# Altium PCB led_light.PcbDoc
Units mil, origin at the board's own origin, x right, y up, seen from the top; angles counter-clockwise.
Board outline 6000 x 4000 mil, 2 copper layers (Top Layer, Bottom Layer); 33 components, 19 nets, 100 pads, 3 vias.
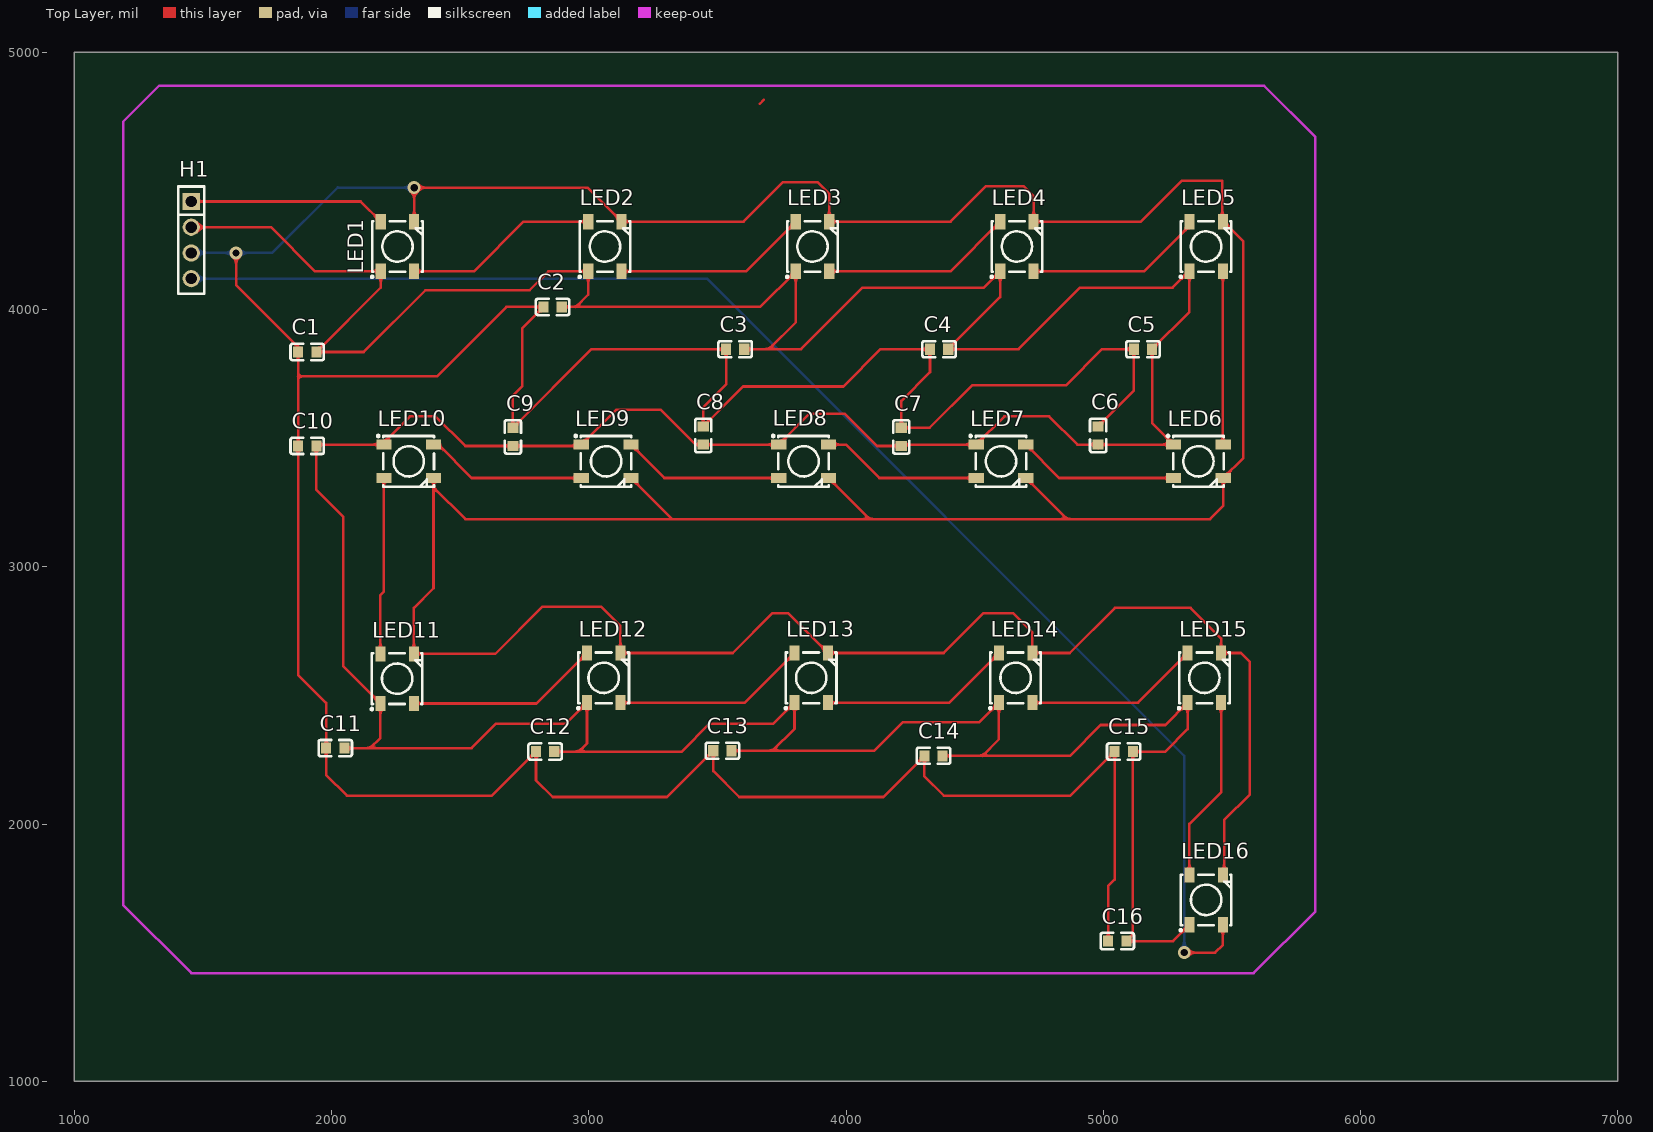
[diagram p0: Top Layer view]
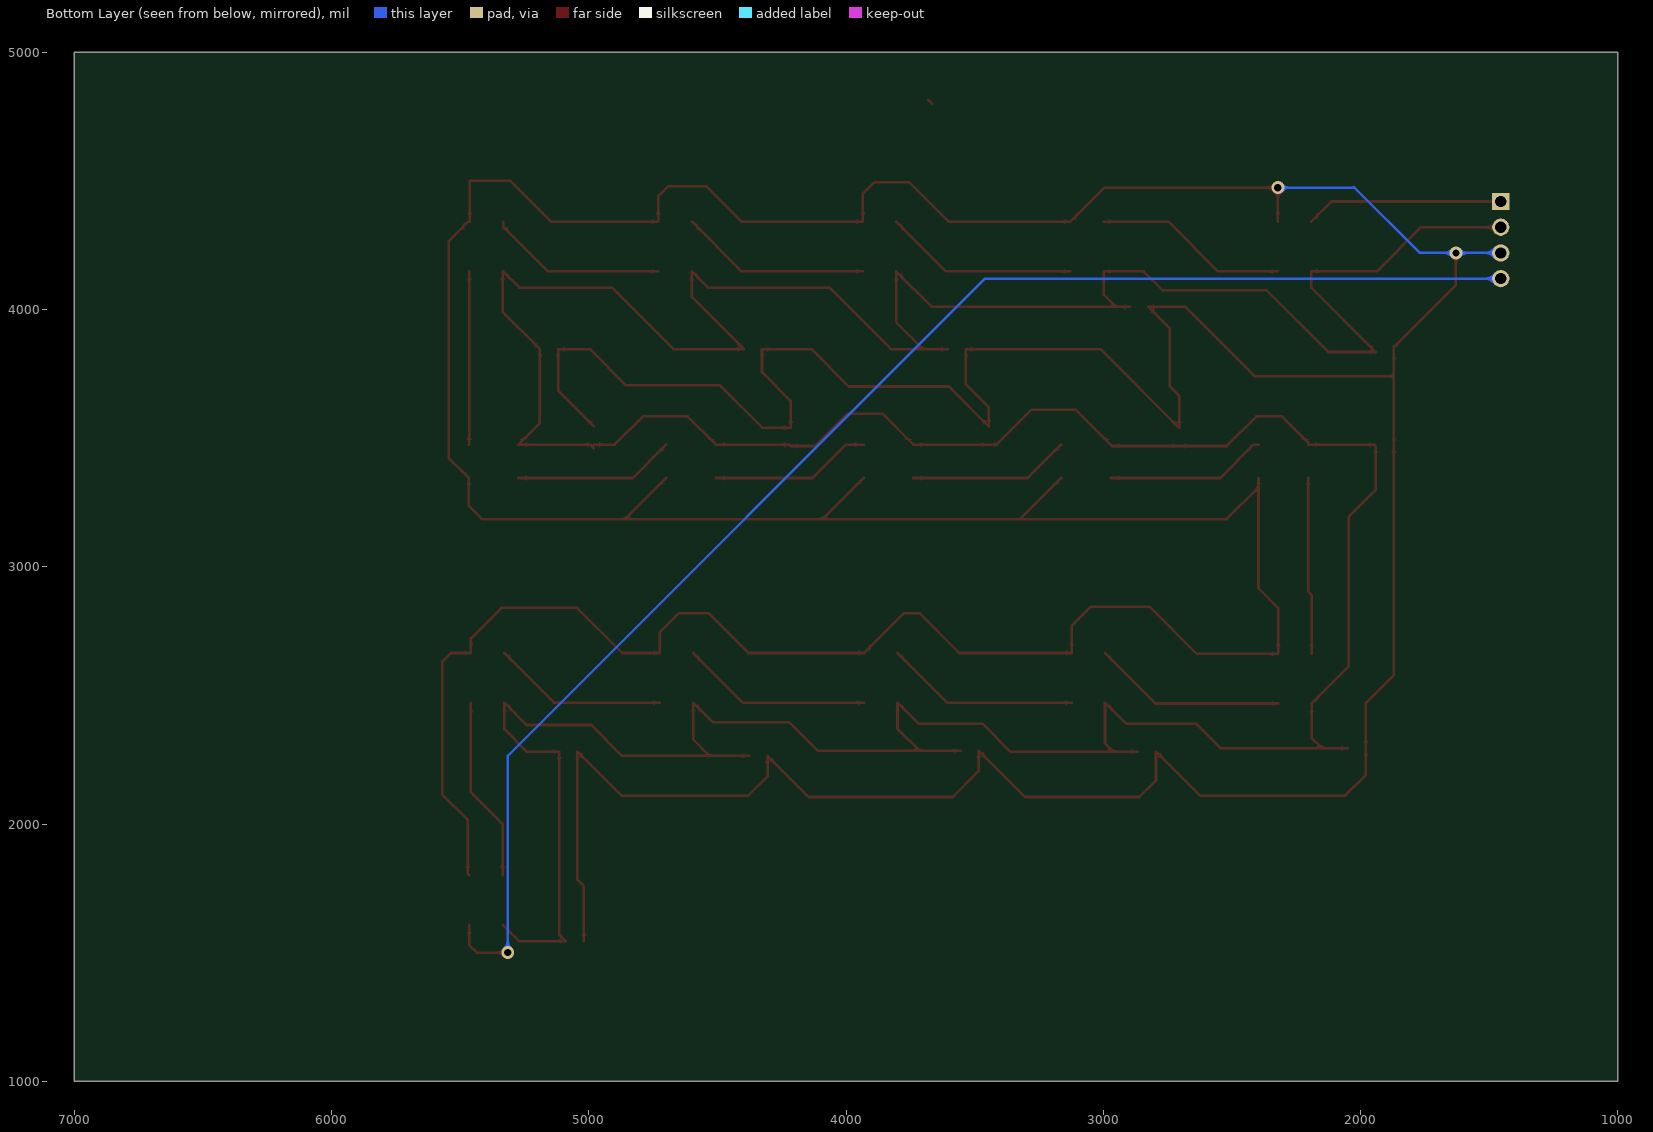
[diagram p1: Bottom Layer view, seen from below]

## Layer stack, top to bottom
Top Solder: solder mask 0.4, Solder Resist, Dk 3.5
Top Layer: signal copper 1.4
Dielectric 1: dielectric 12.6, FR-4, Dk 4.8
Bottom Layer: signal copper 1.4
Bottom Solder: solder mask 0.4, Solder Resist, Dk 3.5

## Board outline
1000,1000 7000,1000 7000,5000 1000,5000

## Design rules (kind name [scope] priority, off if disabled: settings)
Clearance [All] p1: gap=10 ignorepadtopadclearanceinfootprint=FALSE except(0: Arc-Hole Track-Hole SMDPad-Hole THPad-Hole Via-Hole Fill-Hole Poly-Hole Region-Hole Text-Hole)
PolygonConnect [All] p1: connectstyle=Relief reliefconductorwidth=10 reliefentries=4 polygonreliefangle="90 Angle" airgapwidth=10
RoutingVias [All] p1: holewidth=28 width=50 viastyle="Through Hole" minholewidth=28 minwidth=50 maxholewidth=28 maxwidth=50
SolderMaskExpansion [All] p1: expansion=4
Width [All] p1: maxlimit=10 minlimit=10 preferedwidth=10
30 further rules are at their usual default settings.

## Components (designator, comment, footprint, x,y, rotation, side; value= is the part's Value field where it differs from the comment)
C1 "Comment" C0603 1905.43,3835 r0 top
C2 "Cap" C0603 2859.57,4010 r0 top value=0.1uF
C3 "Cap" C0603 3569.15,3845.84 r0 top value=0.1uF
C4 "Cap" C0603 4361.86,3845.84 r0 top value=0.1uF
C5 "Cap" C0603 5154.57,3845.84 r0 top value=0.1uF
C6 "Cap" C0603 4980,3510.39 r270 top value=0.1uF
C7 "Cap" C0603 4215,3505 r270 top value=0.1uF
C8 "Cap" C0603 3445,3510.39 r270 top value=0.1uF
C9 "Cap" C0603 2705,3505 r270 top value=0.1uF
C10 "Cap" C0603 1905.43,3470 r0 top value=0.1uF
C11 "Cap" C0603 2014.57,2295 r0 top value=0.1uF
C12 "Cap" C0603 2830.44,2281.67 r0 top value=0.1uF
C13 "Cap" C0603 3519.57,2285 r0 top value=0.1uF
C14 "Cap" C0603 4340.43,2265 r0 top value=0.1uF
C15 "Cap" C0603 5079.57,2281.67 r0 top value=0.1uF
C16 "Cap" C0603 5054.57,1545 r0 top value=0.1uF
H1 "PZ254V-11-04P" HDR-TH_4P-P2.54-V-M 1454.61,4270 r270 top
LED1 "WS2812B-B" LED-SMD_4P-L5.0-W5.0-TL_WS2812B-B 2256.3,4245 r90 top
LED2 "WS2812B-B" LED-SMD_4P-L5.0-W5.0-TL_WS2812B-B 3063.02,4245 r90 top
LED3 "WS2812B-B" LED-SMD_4P-L5.0-W5.0-TL_WS2812B-B 3869.73,4245 r90 top
LED4 "WS2812B-B" LED-SMD_4P-L5.0-W5.0-TL_WS2812B-B 4664.4,4245 r90 top
LED5 "WS2812B-B" LED-SMD_4P-L5.0-W5.0-TL_WS2812B-B 5400,4245 r90 top
LED6 "WS2812B-B" LED-SMD_4P-L5.0-W5.0-TL_WS2812B-B 5370,3410 r0 top
LED7 "WS2812B-B" LED-SMD_4P-L5.0-W5.0-TL_WS2812B-B 4602.5,3410 r0 top
LED8 "WS2812B-B" LED-SMD_4P-L5.0-W5.0-TL_WS2812B-B 3835,3410 r0 top
LED9 "WS2812B-B" LED-SMD_4P-L5.0-W5.0-TL_WS2812B-B 3067.5,3410 r0 top
LED10 "WS2812B-B" LED-SMD_4P-L5.0-W5.0-TL_WS2812B-B 2300,3410 r0 top
LED11 "WS2812B-B" LED-SMD_4P-L5.0-W5.0-TL_WS2812B-B 2255,2565 r90 top
LED12 "WS2812B-B" LED-SMD_4P-L5.0-W5.0-TL_WS2812B-B 3058.02,2568.31 r90 top
LED13 "WS2812B-B" LED-SMD_4P-L5.0-W5.0-TL_WS2812B-B 3864.73,2568.31 r90 top
LED14 "WS2812B-B" LED-SMD_4P-L5.0-W5.0-TL_WS2812B-B 4659.4,2568.31 r90 top
LED15 "WS2812B-B" LED-SMD_4P-L5.0-W5.0-TL_WS2812B-B 5393.15,2568.31 r90 top
LED16 "WS2812B-B" LED-SMD_4P-L5.0-W5.0-TL_WS2812B-B 5400,1705 r90 top

## Footprints (in the part's own frame and the unit in brackets; to place one, negate y for a bottom-side part, rotate by r counter-clockwise, add the part's x,y. Pads: shape width x height; smd on the part's side, far side on the other; paste and mask are expansions set on the pad)
C0603 [mm]
  rect 1x1.1 smd: 1(0.9,0) 2(-0.9,0)
  silkscreen extent -1.65,-0.8 1.65,0.8
HDR-TH_4P-P2.54-V-M [mm]
  rect 1.7x1.7 hole 1.1: 1(-3.81,0)
  round 1.7 hole 1.1: 2(-1.27,0) 3(1.27,0) 4(3.81,0)
  silkscreen extent -5.29,-1.27 5.29,1.27
LED-SMD_4P-L5.0-W5.0-TL_WS2812B-B [mm]
  rect 1.5x1 smd: 1(-2.45,1.65) 2(-2.45,-1.65) 3(2.45,-1.65) 4(2.45,1.65)
  silkscreen extent -3.1,-2.5 2.5,2.6

## Part data
C2 C3 C4 C5 C6 C7 C8 C9 C10 C11 C12 C13 C14 C15 C16: "Capacitor", LatestRevisionDate=17-Jul-2002, LatestRevisionNote="Re-released for DXP Platform.", PackageDescription="Radial Cap, Thru-Hole; 2 Leads; 0.3 in Pin Spacing", PackageReference=RAD-0.3, Published=8-Jun-2000, Publisher="Altium Limited"
H1: library part PZ254V-11-04P_C2691448, BOM_JLCPCB Part Class="Extended Part", BOM_Manufacturer=XFCN(台湾, BOM_Manufacturer Part=PZ254V-11-04P, BOM_Supplier=LCSC, BOM_Supplier Part=C2691448, Contributor=LCSC, spicePre=H, spiceSymbolName=PZ254V-11-04P_C2691448
LED1 LED2 LED3 LED4 LED5 LED6 LED7 LED8 LED9 LED10 LED11 LED12 LED13 LED14 LED15 LED16: BOM_JLCPCB Part Class="Extended Part", BOM_Manufacturer=Worldsemi, BOM_Manufacturer Part=WS2812B-B, BOM_Supplier=LCSC, BOM_Supplier Part=C114586, Contributor=LCSC, spicePre=L, spiceSymbolName=WS2812B-B

## Via types
v1: diameter 50, hole 28, Top Layer to Bottom Layer, 3 vias

## Nets (pads, with @x,y where several pads share a name; then routed paths per layer and width w, separated by ;. In a path a pad name is that pad's centre, name@x,y a point inside that pad or via, vN(x,y) a via of type N, cw(c..) or ccw(c..) an arc to the next point about the centre after c; other vN are vias at no path point)
5v: C1.1 C2.1 C3.1 C4.1 C5.1 C6.1 C7.1 C8.1 C9.1 C10.1 C11.1 C12.1 C13.1 C14.1 C15.1 C16.1 H1.2 LED1.1 LED2.1 LED3.1 LED4.1 LED5.1 LED6.1 LED7.1 LED8.1 LED9.1 LED10.1 LED11.1 LED12.1 LED13.1 LED14.1 LED15.1 LED16.1 | length 18476.7
  Top Layer w10: H1.2 1765,4320 1936.46,4148.54 LED1.1 2191.34,4085.47 C1.1 2125,3835 2365,4075 2770,4075 2843.54,4148.54 LED2.1 2998.05,4058.05 2950,4010 ; C11.1 2150,2295 ; C12.1 2961.67,2281.67 ; C2.1 2950,4010 ; C13.1 3715,2285 ; C3.1 3700,3845.84 ; C14.1 4530,2265 ; C6.1@4980,3460 4994.96,3474.96 LED6.1 5190,3558.5 C5.1 5335.04,3990.88 LED5.1 ; C6.1 4900.04,3474.96 4790,3585 4616.08,3585 LED7.1 4220.39,3474.96 C7.1 4120.43,3469.57 3995,3595 3858.58,3595 LED8.1 C8.1 3415.04,3474.96 3280,3610 3106.08,3610 LED9.1 2965.65,3469.57 C9.1 2520.43,3469.57 2405,3585 2305,3585 2203.54,3483.54 LED10.1 1945.83,3474.96 C10.1 1940.87,3299.13 2045,3195 2045,2613.58 LED11.1 2190.04,2335.04 2150,2295 ; LED5.1@5333.19,4148.54 5269.65,4085 4910,4085 4670.84,3845.84 C4.1 4599.44,4047.99 LED4.1 4535.9,4085 4065,4085 3825.84,3845.84 3700,3845.84 ; LED16.1 5271.5,1545 C16.1 5115,1570 C15.1 5241.34,2281.67 5328.19,2368.52 LED15.1 5241.34,2385 4990,2385 4870,2265 4530,2265 ; 2150,2295 2545,2295 2640,2390 2911.2,2390 LED12.1 2993.05,2313.05 2961.67,2281.67 ; 2950,4010 3666.22,4010 LED3.1 3804.76,3950.61 3700,3845.84 ; 2961.67,2281.67 3361.67,2281.67 3470,2390 3717.91,2390 LED13.1 3799.76,2369.76 3715,2285 ; 3715,2285 4110,2285 4220,2395 4517.59,2395 LED14.1 4594.44,2329.44 4530,2265
do: H1.4 LED16.2 | length 5634.7
  Top Layer w10: v1(5315,1500) 5435,1500 5464.96,1529.96 LED16.2
  Bottom Layer w10: H1.4 3460,4120 5315,2265 v1(5315,1500)
GND: C1.2 C2.2 C3.2 C4.2 C5.2 C6.2 C7.2 C8.2 C9.2 C10.2 C11.2 C12.2 C13.2 C14.2 C15.2 C16.2 H1.3 LED1.3 LED2.3 LED3.3 LED4.3 LED5.3 LED6.3 LED7.3 LED8.3 LED9.3 LED10.3 LED11.3 LED12.3 LED13.3 LED14.3 LED15.3 LED16.3 | length 27724.5
  Top Layer w10: v1(1629.18,4220) 1629.18,4095 1870,3854.18 C1.2 1870,3740 ; LED1.3 v1(2321.26,4473.74) 2995.69,4473.74 LED2.3 3601.45,4341.45 3755,4495 3890,4495 3934.69,4450.31 LED3.3 4406.45,4341.45 4545,4480 4690,4480 4729.36,4440.64 LED4.3 5146.45,4341.45 5305,4500 5463.11,4500 LED5.3@5463.11,4341.45 ; LED10.3 2396.45,3308.55 ; LED9.3 3320,3189 3320,3185 ; C8.2@3444.57,3545.83 3444.57,3619.57 3533.71,3708.71 C3.2 3010.41,3845.84 C9.2 2705,3665 2741,3701 2741,3926.87 C2.2 2680,4010 2410,3740 1870,3740 ; C8.2 3600,3700.83 3989.98,3700.83 4135,3845.84 C4.2 4326.42,3756.42 4215,3645 C7.2 4325.43,3540.43 4490,3705 4855,3705 4995.84,3845.84 C5.2 5119.13,3684.96 C6.2 ; LED8.3 4091.5,3185 ; LED7.3 4859,3185 ; C16.2 5019.13,1759.13 5044.14,1784.14 C15.2 4872.47,2110 4380,2110 4305,2185 C14.2 4145,2105 3585,2105 3484.13,2205.87 C13.2 3304.13,2105 2860,2105 2795,2170 C12.2 2623.34,2110 2060,2110 1979.13,2190.87 C11.2 1979.13,2470.87 1870,2580 C10.2 1870,3740 ; LED16.3 5470,1806.5 5470,2015 5570.24,2115.24 5570.24,2629.76 5535.24,2664.76 LED15.3 5458.11,2721.05 5339.16,2840 5045,2840 4869.76,2664.76 LED14.3 4724.36,2744.36 4648.72,2820 4535,2820 4379.76,2664.76 LED13.3 3774.45,2820 3715,2820 3559.76,2664.76 LED12.3 3122.97,2770 3047.97,2845 2820,2845 2636.45,2661.45 LED11.3 2319.96,2839.96 2396.45,2916.45 2396.45,3308.55 ; LED5.3 5468.55,4341.45 5545,4265 5545,3423.59 LED6.3 5466.45,3236.5 5414.96,3185 4859,3185 ; 2396.45,3308.55 2520,3185 3320,3185 ; 3320,3185 4091.5,3185 ; 4091.5,3185 4859,3185
  Bottom Layer w10: H1.3 v1(1629.18,4220) 1769.18,4220 2024.18,4475 2025.44,4473.74 v1(2321.26,4473.74)
NetH1_1: H1.1 LED1.4 | length 769.3
  Top Layer w10: H1.1 2112.8,4420 LED1.4
NetLED1_2: LED1.2 LED2.4 | length 756.7
  Top Layer w10: LED1.2 2553.54,4148.54 2746.45,4341.45 LED2.4
NetLED2_2: LED2.2 LED3.4 | length 756.7
  Top Layer w10: LED2.2 3611.85,4148.54 LED3.4
NetLED3_2: LED3.2 LED4.4 | length 744.7
  Top Layer w10: LED3.2 4406.52,4148.54 LED4.4
NetLED4_2: LED4.2 LED5.4 | length 694.4
  Top Layer w10: LED4.2 5158.54,4148.54 5333.19,4323.19 LED5.4@5333.19,4341.45
NetLED5_2: LED5.2 LED6.4 | length 674.2
  Top Layer w10: LED5.2 5464.96,3476.46 LED6.4
NetLED6_2: LED6.2 LED7.4 | length 628.4
  Top Layer w10: LED7.4 4828.88,3345.04 LED6.2
NetLED7_2: LED7.2 LED8.4 | length 628.4
  Top Layer w10: LED8.4 4000.04,3474.96 4129.96,3345.04 LED7.2
NetLED8_2: LED8.2 LED9.4 | length 628.4
  Top Layer w10: LED9.4 3293.88,3345.04 LED8.2
NetLED9_2: LED9.2 LED10.4 | length 628.4
  Top Layer w10: LED10.4 2415.04,3474.96 2544.96,3345.04 LED9.2
NetLED10_2: LED10.2 LED11.4 | length 689.2
  Top Layer w10: LED11.4 2190.04,2890.04 2203.54,2903.54 LED10.2
NetLED11_2: LED11.2 LED12.4 | length 754.4
  Top Layer w10: LED11.2 2796.83,2468.54 LED12.4
NetLED12_2: LED12.2 LED13.4 | length 756.7
  Top Layer w10: LED12.2 3606.85,2471.85 LED13.4
NetLED13_2: LED13.2 LED14.4 | length 744.7
  Top Layer w10: LED13.2 4401.52,2471.85 LED14.4
NetLED14_2: LED14.2 LED15.4 | length 683.7
  Top Layer w10: LED14.2 5135.27,2471.85 LED15.4
NetLED15_2: LED15.2 LED16.4 | length 721.4
  Top Layer w10: LED16.4 5335.04,2000.04 5458.11,2123.11 LED15.2
copper on no net: | length 21.2
  Top Layer w10: 3665,4800 3680,4815

## Keep-outs
Top Layer:
  lines w10: 1190,1685 1190,4730 1330,4870 5625,4870 5825,4670 5825,1660 5585,1420 1455,1420 1190,1685